# Allegro board AVRUSB500.brd
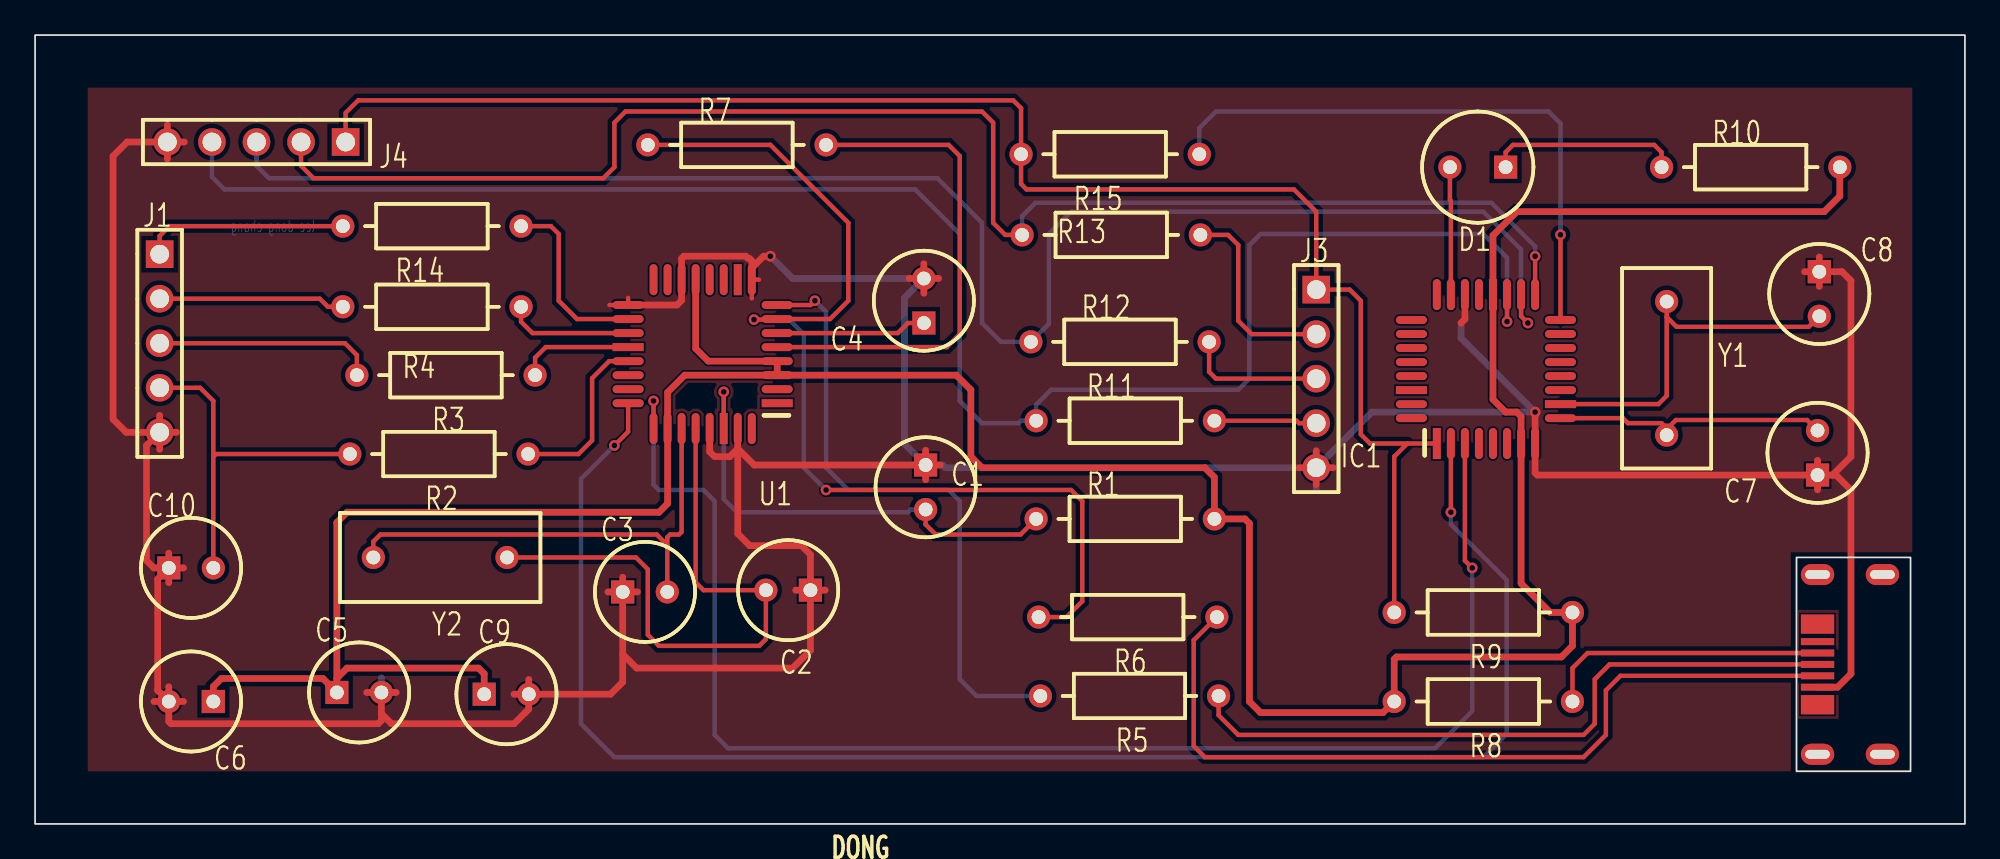
[diagram p0: board, top side]
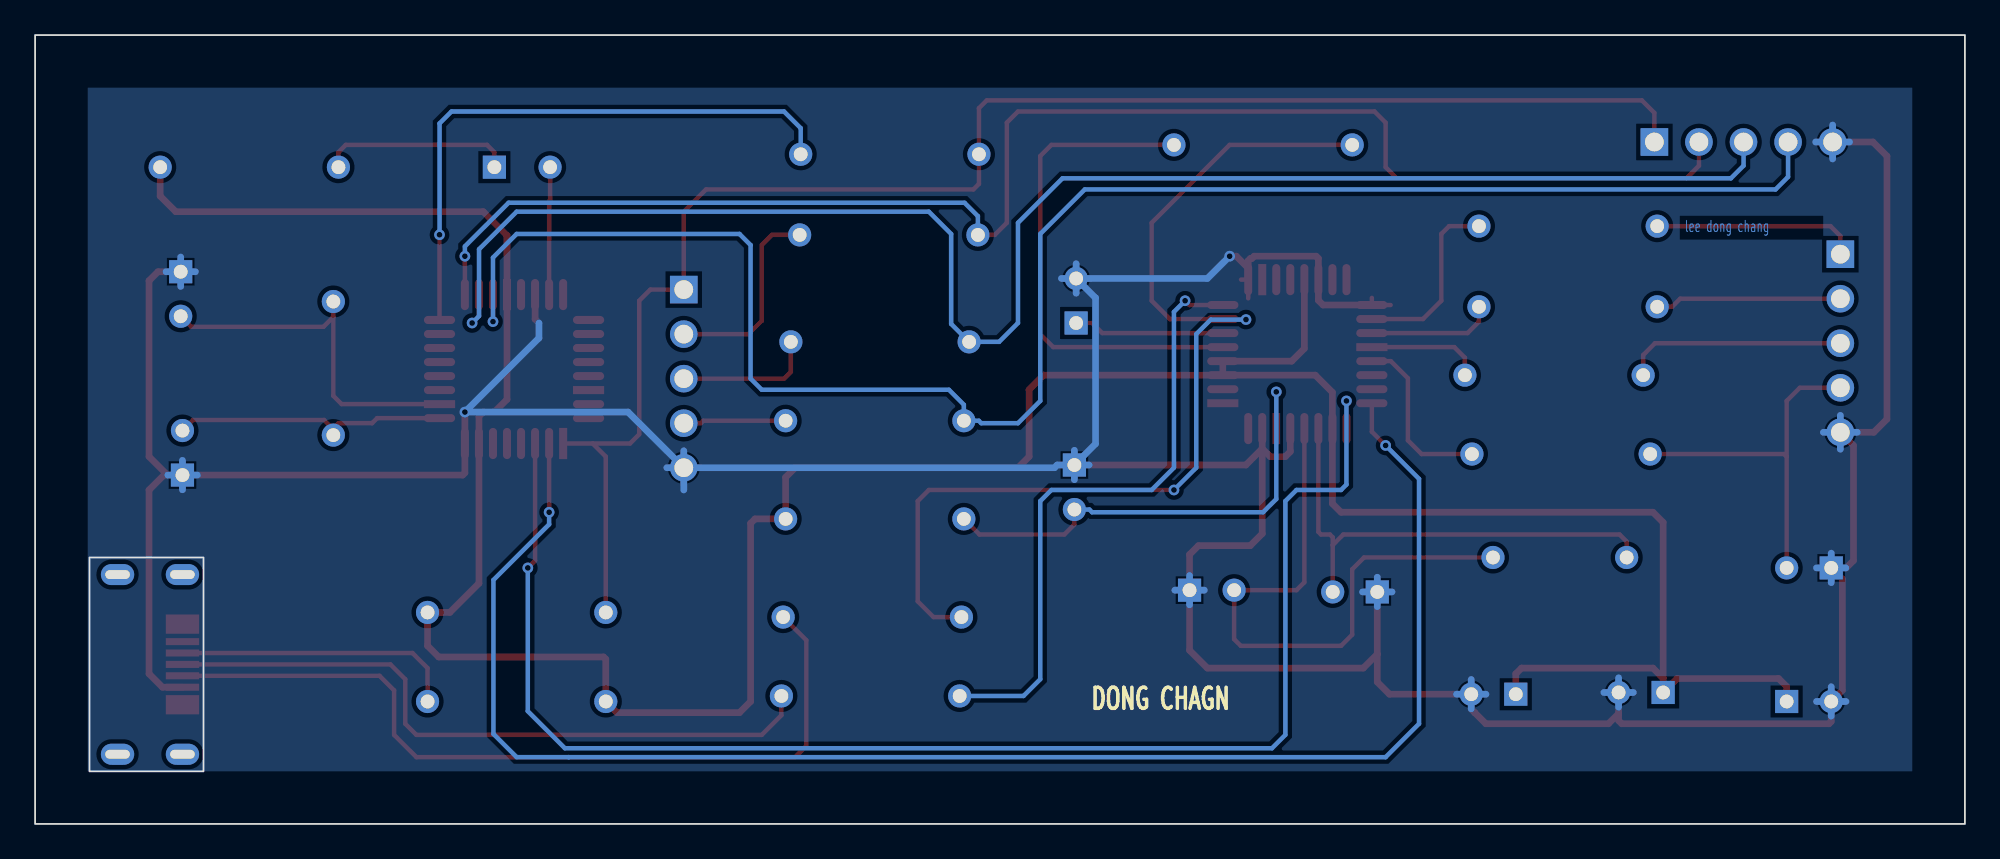
[diagram p1: board, bottom side, seen from below]

Outline 110 x 45 mm; copper layers: TOP, BOTTOM. Coordinates in mm from the lower left corner of the outline.
Outline path: rectangle 0,0 110,45

## Design rules (mm)
net group POWERNETS: nets GND VCC

## Placement (name value [footprint] x y rotation side)
C1  47nF  [CPCYL1D225LS100031]  50.76 20.48 270 top
C2  27pF  [CPCYL1D225LS100031]  44.2 13.34 180 top
C3  27pF  [CPCYL1D225LS100031]  33.49 13.23 0 top
C4  47nF  [CPCYL1D225LS100031]  50.66 28.57 90 top
C5  100nF  [CPCYL1D225LS100031]  17.2 7.5 0 top
C6  1uF  [CPCYL1D225LS100031]  10.16 6.99 180 top
C7  100nF  [CPCYL1D225LS100031]  101.6 19.9 90 top
C8  100nF  [CPCYL1D225LS100031]  101.7 31.5 270 top
C9  100nF  [CPCYL1D225LS100031]  25.6 7.4 0 top
C10  22nF  [CPCYL1D225LS100031]  7.62 14.61 0 top
D1  LED  [CYLD250LS125031]  83.82 37.47 180 top
IC1  ATmega8  [QUAD80M32WG900]  79.9 21.7 0 top
J1  bbpg_Bitbang  [BLKCON100VHTM1SQSW1005]  7.1 32.5 270 top
J2  USBA  [MICRO_USB]  105.3 9.1 90 top
J3  avrusb500_out  [BLKCON100VHTM1SQSW1005]  73.03 30.48 270 top
J4  firmware_in  [BLKCON100VHTM1SQSW1005]  17.7 38.9 180 top
R1  470  [AX400X100031]  57.06 17.4 0 top
R2  220  [AX400X100031]  28.1 21.1 180 top
R3  220  [AX400X100031]  28.5 25.6 180 top
R4  220  [AX400X100031]  27.7 29.5 180 top
R5  27  [AX400X100031]  67.46 7.3 180 top
R6  27  [AX400X100031]  67.36 11.8 180 top
R7  1.5k  [AX400X100031]  34.92 38.73 0 top
R8  2.2  [AX400X100031]  87.63 6.99 180 top
R9  10k  [AX400X100031]  87.63 12.06 180 top
R10  470  [AX400X100031]  92.71 37.47 0 top
R11  1k  [AX400X100031]  57.06 23 0 top
R12  220  [AX400X100031]  56.76 27.5 0 top
R13  1k  [AX400X100031]  56.26 33.6 0 top
R14  220  [AX400X100031]  27.7 34.1 180 top
R15  220  [AX400X100031]  66.36 38.2 180 top
U1  FT232BM  [QUAD80M32WG900]  42.3 24 90 top
Y1  3.6864Mhz  [RAD450X200LS300031]  93 29.8 270 top
Y2  6Mhz  [RAD450X200LS300031]  26.9 15.2 180 top

## Library data of the parts
C1-C5 C7-C10 = CAPACITOR NON-POL: alternate symbols: (SMDCAP)
C6 = CAPACITOR POL: alternate symbols: (SMDCAP)
D1 = LED
IC1 = ATmega8-DIL28_1
J1 J3 J4 = CON5
J2 = CON4_7
R1-R15 = R: alternate symbols: (SMDRES)
U1 = FT232BM_2: alternate symbols: (JEDECMS026)
Y1 Y2 = ZTA

## Footprints (pads in the part's own frame, mm; a bottom-side part is the same pattern mirrored in y, then rotated)
AX400X100031
  round 1.321 hole 0.787: 1(0,0) 2(10.16,0)
BLKCON100VHTM1SQSW1005
  rect 1.575x1.575 hole 1.067: 1(0,0)
  round 1.575 hole 1.067: 2(2.54,0) 3(5.08,0) 4(7.62,0) 5(10.16,0)
CPCYL1D225LS100031
  rect 1.321x1.321 hole 0.787: 1(0,0)
  round 1.321 hole 0.787: 2(2.54,0)
CYLD250LS125031
  rect 1.321x1.321 hole 0.787: 1(0,0)
  round 1.321 hole 0.787: 2(3.175,0)
MICRO_USB
  oval 1.2x1.9 hole 0.5x1.4: (-5.125,3.7) (-5.125,0) (5.125,3.7) (5.125,0)
  rect 1.1x1.9 smd: (-2.3,3.7) (2.3,3.7)
  rect 0.4x1.9 smd: 1(-1.3,3.7) 2(-0.65,3.7) 3(0,3.7) 4(0.65,3.7) 5(1.3,3.7)
QUAD80M32WG900
  rect 0.457x1.778 smd: 1(0,0) 20(3.2,8.496)
  oval 0.457x1.778 smd: 2(0.8,0) 3(1.6,0) 4(2.4,0) 5(3.2,0) 6(4,0) 7(4.801,0) 8(5.601,0) 17(5.601,8.496) 18(4.801,8.496) 19(4,8.496) 21(2.4,8.496) 22(1.6,8.496) 23(0.8,8.496) 24(0,8.496)
  oval 1.778x0.457 smd: 9(7.048,1.448) 11(7.048,3.048) 12(7.048,3.848) 13(7.048,4.648) 14(7.048,5.448) 15(7.048,6.248) 16(7.048,7.048) 25(-1.448,7.048) 26(-1.448,6.248) 27(-1.448,5.448) 28(-1.448,4.648) 29(-1.448,3.848) 31(-1.448,2.248) 32(-1.448,1.448)
  rect 1.778x0.457 smd: 10(7.048,2.248) 30(-1.448,3.048)
RAD450X200LS300031
  round 1.321 hole 0.787: 1(0,0) 2(7.62,0)

## Nets
+5V: J2.4 R8.1
GND: C1.1 C2.1 C3.1 C4.2 C5.2 C6.2 C7.1 C8.1 C9.2 C10.1 IC1.8(GND) IC1.22(AGND) J1.5 J2.1 J3.5 J4.5 U1.9(GND) U1.14(PWRCTL) U1.17(GND1) U1.29(AGND) U1.31(TEST)
VCC: C5.1 C6.1 C9.1 IC1.7(VCC) IC1.20(AVCC) R1.2 R8.2 R9.1 R10.2 U1.3(VCC) U1.4(RESET#) U1.13(VCC-IO) U1.26(VCC1)
BMISO: J1.3 R3.2
BMOSI: J1.2 R4.2
BRESET: J1.1 R14.2
BSCK: C10.2 J1.4 R2.2
D+: J2.2 R6.1
D-: J2.3 R5.1
F_MISO: IC1.18((MISO) PB4) J4.3 R12.1
F_MOSI: IC1.17((OC2/MOSI) PB3) J4.2 R13.1
F_SCK: IC1.19((SCK) PB5) J4.4 R11.1
MISO: J3.3 R12.2
MOSI: J3.2 R13.2
RESET: IC1.1(PC6 (R\E\S\E\T\)) J3.1 J4.1 R9.2 R15.2
RXD: IC1.2(PD0 (RXD)) U1.24(RXD)
SCK: J3.4 R11.2
TXD: IC1.3(PD1 (TXD)) U1.25(TXD)
N02483: R6.2 R7.1 U1.7(USBDP)
N02615: R5.2 U1.8(USBDM)
N03527: C4.1 U1.6(3V3OUT)
N06839: R2.1 U1.21(DTR#)
N06967: R3.1 U1.20(DSR#)
N07033: R4.1 U1.19(DCD#)
N07247: R14.1 U1.18(RI#)
N11951: R7.2 U1.5(RSTOUT#)
N15182: C7.2 IC1.9(PB6 (XT1/TOSC1)) Y1.2
N15289: C8.2 IC1.10(PB7 (XT2/TOSC2)) Y1.1
N19734: D1.2(CATHODE) IC1.23((ADC0) PC0)
N20572: D1.1(ANODE) R10.1
N22544: IC1.16((SS/OC1B) PB2) R15.1
N41098: C3.2 U1.27(XTIN) Y2.2
N41106: C2.2 U1.28(XTOUT) Y2.1
N49165: C1.2 R1.1 U1.30(AVCC)

Pads without a net: IC1 4 5 6 11 12 13 14 15 21 24 25 26 27 28 29 30 31 32; J2 5; U1 1 2 10 11 12 15 16 22 23 32

## Via types
v1: diameter 0.61, hole 0.33, TOP to BOTTOM, 14 vias

## Routing (per net, layer and track width the routed paths; a pad name or vN(x,y) marks a point on that pad's centre or on a via; arc(x,y) is an arc through that point)
+5V: length 16.2
  TOP w0.254: R8.1 87.63,8.89 88.49,9.75 J2.4
GND: length 319.9
  TOP w0.254: 33.8,30.01 U1.17 32.74,29.6 ; 41.26,31.05 U1.9 40.85,29.98
  TOP w0.381: J3.5 73.03,21.29 ; J3.5 73.03,19.35 ; J3.5 73.99,20.32 ; J3.5 72.06,20.32 ; C10.1 8.46,14.61 ; C10.1 7.62,15.44 ; C10.1 7.62,13.77 ; 7.1,21.37 J1.5 ; J1.5 7.1,23.31 ; J1.5 8.07,22.34 ; 20.58,7.5 C5.2 18.9,7.5 ; C1.1 51.6,20.48 ; C1.1 50.76,21.31 ; C1.1 50.76,19.64 ; 100.86,31.5 C8.1 ; C8.1 101.7,32.34 ; C8.1 101.7,30.66 ; 101.6,19.06 C7.1 101.6,20.74 ; 7.54,37.93 J4.5 ; J4.5 7.54,39.87 ; J4.5 8.51,38.9 ; 32.66,13.23 C3.1 ; C3.1 34.33,13.23 ; C3.1 33.49,14.07 ; 50.66,30.28 C4.2 ; C4.2 49.82,31.11 ; C4.2 50.66,31.95 ; C4.2 51.5,31.11 ; 45.03,13.34 C2.1 43.36,13.34 ; C6.2 7.62,7.82 ; C6.2 8.46,6.99 ; C6.2 6.78,6.99 ; 27.3,7.4 C9.2 28.14,8.24
  TOP w0.382: C3.1 33.49,9.69 ; 33.49,9.69 33.49,8.1 32.8,7.4 C9.2 28.14,6.55 27.94,6.35 27.94,6.35 27.3,5.71 20.32,5.71 19.74,6.29 ; 33.49,9.69 34.29,8.89 43.18,8.89 44.2,9.9 C2.1 44.2,15.37 43.69,15.88 40.73,15.88 40.05,16.56 40.05,21.41 ; C1.1 40.99,20.48 40.05,21.41 ; 40.05,21.41 39.6,20.95 38.74,20.95 38.45,21.24 U1.29 ; 40.05,21.41 U1.31 ; C5.2 19.74,6.29 ; 19.74,6.29 19.74,5.9 19.56,5.71 7.75,5.71 7.62,5.84 C6.2 6.99,7.62 6.99,13.97 C10.1 6.77,14.61 6.35,15.02 6.35,21.59 J1.5 5.2,22.34 4.45,23.09 4.45,38.1 5.25,38.9 J4.5 ; 40.85,31.71 41.53,32.38 v1(41.91,32.38) ; 40.85,31.71 U1.9 ; 40.85,31.71 40.85,32.13 40.72,32.26 40.64,32.26 40.51,32.38 36.98,32.38 36.85,32.26 U1.14 36.85,29.87 36.59,29.6 U1.17 ; 102.45,19.9 102.66,19.9 103.5,19.05 103.5,8.56 102.74,7.8 J2.1 ; 102.45,19.9 103.5,20.95 103.5,30.99 102.99,31.5 C8.1 ; 102.45,19.9 C7.1 85.63,19.9 85.5,20.03 IC1.8 v1(85.5,23.5) ; IC1.22 81.5,28.8 81.28,28.57
  BOTTOM w0.381: C5.2 19.74,8.34 ; C5.2 18.9,7.5 ; C5.2 19.74,6.66 ; C5.2 20.58,7.5 ; C6.2 7.62,7.82 ; C6.2 7.62,6.15 ; C6.2 8.46,6.99 ; C6.2 6.78,6.99 ; 7.62,13.77 C10.1 ; C10.1 8.46,14.61 ; C10.1 7.62,15.44 ; C10.1 6.78,14.61 ; 50.76,19.64 C1.1 ; C1.1 51.74,20.48 51.89,20.32 J3.5 ; C1.1 50.76,21.31 ; C1.1 49.92,20.48 ; C1.1 49.55,21.68 49.55,30.01 C4.2 ; 28.14,6.56 C9.2 ; C9.2 28.14,8.24 ; C9.2 27.3,7.4 ; C9.2 28.98,7.4 ; C4.2 51.5,31.11 ; C4.2 43.18,31.11 v1(41.91,32.38) ; C4.2 50.66,31.95 ; C4.2 50.66,30.28 ; 6.13,22.34 J1.5 ; J1.5 7.1,21.37 ; J1.5 7.1,23.31 ; J1.5 8.07,22.34 ; C7.1 100.75,19.9 ; C7.1 102.44,19.9 ; C7.1 101.6,19.06 ; C7.1 101.6,20.74 ; 43.36,13.34 C2.1 ; C2.1 45.03,13.34 ; C2.1 44.2,14.17 ; C2.1 44.2,12.5 ; 101.7,30.66 C8.1 ; C8.1 101.7,32.34 ; C8.1 102.54,31.5 ; C8.1 100.86,31.5 ; J4.5 7.54,39.87 ; J4.5 7.54,37.93 ; J4.5 6.57,38.9 ; J4.5 8.51,38.9 ; J3.5 76.2,23.5 v1(85.5,23.5) 81.28,27.72 81.28,28.57 ; J3.5 73.99,20.32 ; J3.5 73.03,21.29 ; J3.5 73.03,19.05 ; 33.49,12.4 C3.1 ; C3.1 34.33,13.23 ; C3.1 32.66,13.23 ; C3.1 33.49,14.07
VCC: length 184.6
  TOP w0.382: U1.3 37.03,25.6 36.05,24.62 U1.26 36.05,18.27 35.56,17.78 17.78,17.78 17.2,17.2 17.2,8.31 ; U1.3 U1.4 38.37,26.4 37.65,27.12 U1.13 ; U1.3 52.51,25.6 53.34,24.77 53.34,20.95 53.98,20.32 66.67,20.32 67.22,19.77 R1.2 68.96,17.4 69.22,17.14 69.22,6.99 69.85,6.35 76.83,6.35 77.47,6.99 77.47,9.4 77.6,9.53 87,9.53 87.63,10.16 R9.1 86.36,12.06 84.7,13.72 84.7,23.25 84.45,23.5 83.82,23.5 83.1,24.21 IC1.20 83.1,33.57 84.45,34.92 101.98,34.92 102.87,35.81 R10.2 ; C9.1 25.6,8.56 25.27,8.89 17.78,8.89 17.2,8.31 ; 17.2,8.31 C5.1 16.4,8.3 10.62,8.3 10.16,7.84 C6.1
BMISO: length 12.7
  TOP w0.254: J1.3 17.66,27.42 18.34,26.75 R3.2
BMOSI: length 10.6
  TOP w0.254: J1.2 16.23,29.96 16.69,29.5 R4.2
BRESET: length 11.7
  TOP w0.254: J1.1 7.1,33.54 7.66,34.1 R14.2
BSCK: length 20.7
  TOP w0.254: 10.16,20.95 10.16,24.13 9.41,24.88 J1.4 ; 10.16,20.95 C10.2 ; 10.16,20.95 10.3,21.1 R2.2
D+: length 47.1
  TOP w0.254: J2.2 90.36,8.45 89.53,7.62 89.53,5.08 88.27,3.81 66.68,3.81 66.04,4.45 66.04,10.48 R6.1
D-: length 38.9
  TOP w0.254: J2.3 89.75,9.1 88.9,8.26 88.9,5.71 88.27,5.08 68.58,5.08 67.46,6.2 R5.1
F_MISO: length 94.1
  TOP w0.254: 84.7,30.2 84.7,28.96 v1(85.09,28.57)
  BOTTOM w0.254: v1(85.09,28.57) 84.69,28.97 84.69,32.78 82.55,34.92 59.05,34.92 57.78,33.66 57.78,28.52 R12.1 55.05,27.5 53.98,28.57 53.98,34.29 51.44,36.83 13.34,36.83 12.62,37.55 J4.3
F_MOSI: length 86.5
  TOP w0.254: J4.2 15.16,37.55 15.88,36.83 32.38,36.83 33.02,37.47 33.02,40.01 33.66,40.64 53.98,40.64 54.61,40.01 54.61,34.29 55.3,33.6 R13.1 ; v1(85.5,32.38) IC1.17
  BOTTOM w0.254: v1(85.5,32.38) 85.5,32.94 83.01,35.43 57.02,35.43 56.26,34.67 R13.1
F_SCK: length 102.4
  TOP w0.254: IC1.19 v1(83.9,28.66)
  BOTTOM w0.254: v1(83.9,28.66) 83.9,32.3 82.55,33.66 69.85,33.66 69.22,33.02 69.22,25.4 68.58,24.77 57.91,24.77 57.06,23.91 R11.1 56.21,23 56.07,22.86 53.98,22.86 52.7,24.13 52.7,33.66 50.16,36.2 10.79,36.2 10.08,36.91 J4.4
MISO: length 8
  TOP w0.254: R12.2 66.92,25.79 67.31,25.4 J3.3
MOSI: length 11.5
  TOP w0.254: R13.2 68,33.6 68.58,33.02 68.58,28.7 69.34,27.94 J3.2
Net_64: length 0.7
  TOP w0.254: 79.9,30.2 79.9,30.86
RESET: length 91.8
  TOP w0.254: 78.22,21.7 77.47,20.95 77.47,12.06 ; 78.22,21.7 IC1.1 ; 78.22,21.7 76.09,21.7 75.56,22.23 75.56,29.84 74.93,30.48 J3.1 73.03,34.92 71.75,36.2 56.52,36.2 56.2,36.51 R15.2 56.2,40.83 55.75,41.27 18.41,41.27 17.7,40.56 J4.1
RXD: length 91.4
  TOP w0.254: U1.24 33.8,22.37 v1(33.02,21.59) ; IC1.2 v1(80.7,17.78)
  BOTTOM w0.254: v1(33.02,21.59) 31.11,19.68 31.11,5.71 33.02,3.81 79.59,3.81 79.59,3.81 82.55,3.81 83.88,5.13 83.88,13.91 80.7,17.09 v1(80.7,17.78)
SCK: length 5.9
  TOP w0.254: R11.2 71.91,23 72.05,22.86 J3.4
TXD: length 83.4
  TOP w0.254: IC1.3 81.5,15.02 v1(81.92,14.61) ; U1.25 v1(35.25,24.13)
  BOTTOM w0.254: v1(35.25,24.13) 35.25,19.36 35.56,19.05 38.1,19.05 38.73,18.41 38.73,5.08 39.5,4.32 79.8,4.32 81.92,6.43 v1(81.92,14.61)
N02483: length 59.6
  TOP w0.254: v1(45.09,19.05) 59.05,19.05 59.69,18.41 59.69,12.7 58.79,11.8 R6.2 ; R7.1 41.91,38.73 46.35,34.29 46.35,29.84 45.31,28.8 41.58,28.8 41.55,28.77 v1(40.98,28.77)
  BOTTOM w0.254: v1(40.98,28.77) 42.98,28.77 43.81,27.94 43.81,20.32 v1(45.09,19.05)
N02615: length 35.6
  TOP w0.254: U1.8 44.21,29.6 v1(44.45,29.84)
  BOTTOM w0.254: v1(44.45,29.84) 45.09,29.21 45.09,20.32 46.35,19.05 52.07,19.05 52.7,18.41 52.7,8.26 53.66,7.3 R5.2
N03527: length 8.6
  TOP w0.254: U1.6 49.17,28 49.75,28.57 C4.1
N06839: length 10
  TOP w0.254: U1.21 32.72,26.4 31.75,25.43 31.75,21.88 30.97,21.1 R2.1
N06967: length 6.5
  TOP w0.254: R3.1 28.5,26.59 29.11,27.2 U1.20
N07033: length 7.2
  TOP w0.254: U1.19 28.35,28 27.7,28.65 R4.1
N07247: length 10.5
  TOP w0.254: R14.1 29.4,34.1 29.84,33.66 29.84,29.84 30.89,28.8 33.8,28.8
N11951: length 28.8
  TOP w0.254: U1.5 51.97,27.2 52.7,27.94 52.7,38.1 52.07,38.73 R7.2
N15182: length 15.7
  TOP w0.254: 93,22.52 93,22.57 92.71,22.86 90.79,22.86 90.5,23.15 IC1.9 ; 93,22.52 93.53,23.04 101,23.04 C7.2 ; 93,22.52 Y1.2
N15289: length 20.8
  TOP w0.254: Y1.1 93,28.92 ; 93,28.92 93,24.42 92.53,23.95 IC1.10 ; 93,28.92 93.56,28.36 101.1,28.36 C8.2
N19734: length 7.3
  TOP w0.254: D1.2 80.64,35.59 80.7,35.53 IC1.23
N20572: length 10.9
  TOP w0.254: R10.1 92.71,38.32 92.29,38.73 84.24,38.73 83.82,38.32 D1.1
N22544: length 34
  TOP w0.254: IC1.16 v1(86.95,33.61)
  BOTTOM w0.254: v1(86.95,33.61) 86.95,39.96 86.27,40.64 67.31,40.64 66.36,39.69 R15.1
N41098: length 28
  TOP w0.254: 36.03,15.91 35.43,16.51 19.68,16.51 19.28,16.11 Y2.2 ; 36.03,15.91 36.03,16.35 36.2,16.51 36.7,16.51 36.85,16.66 U1.27 ; 36.03,15.91 C3.2
N41106: length 34.9
  TOP w0.254: U1.28 37.65,13.78 38.1,13.34 C2.2 41.66,10.54 41.27,10.16 35.56,10.16 34.92,10.79 34.92,14.53 34.25,15.2 Y2.1
N49165: length 27.9
  TOP w0.254: U1.30 v1(39.25,24.65) ; C1.2 50.76,17.08 51.33,16.51 56.17,16.51 R1.1
  BOTTOM w0.254: v1(39.25,24.65) 39.25,18.53 40.01,17.78 49.75,17.78 49.91,17.93 C1.2

## Copper pours and planes (outline as drawn; the poured copper is in the pictures)
+5V on TOP: 100.33,3 100.33,15.24 107,15.24 107,3 ; 2 cut-outs
GND on TOP: 3,3 3,42 107,42 107,3 ; 7 cut-outs
GND on BOTTOM: 3,3 3,42 107,42 107,3 ; 2 cut-outs

## Text on the board
BOTTOM: lee dong chang
Board Geometry/Soldermask Bottom: DONGCHANG
Ref Des/Silkscreen Bottom: DONG CHAGN
Ref Des/Silkscreen Top: DONG
NCLEGEND-1-2: FIGURE | SIZE | 0.33 | 0.7869 | 1.0671 | 1.4x0.5001 | DRILL CHART: TOP to BOTTOM | ALL UNITS ARE IN MILLIMETERS | PLATED | QTY | 14 | 56 | 15 | 4
